# Altium PCB MAIN.PcbDoc
Units mm, origin at the board's own origin, x right, y up, seen from the top; angles counter-clockwise.
Board outline 75 x 50 mm, 2 copper layers (Top Layer, Bottom Layer), stack 1.571 mm thick; 33 components, 35 nets, 141 pads, 6 vias.
Unrouted connection lines stored in the file: 1.
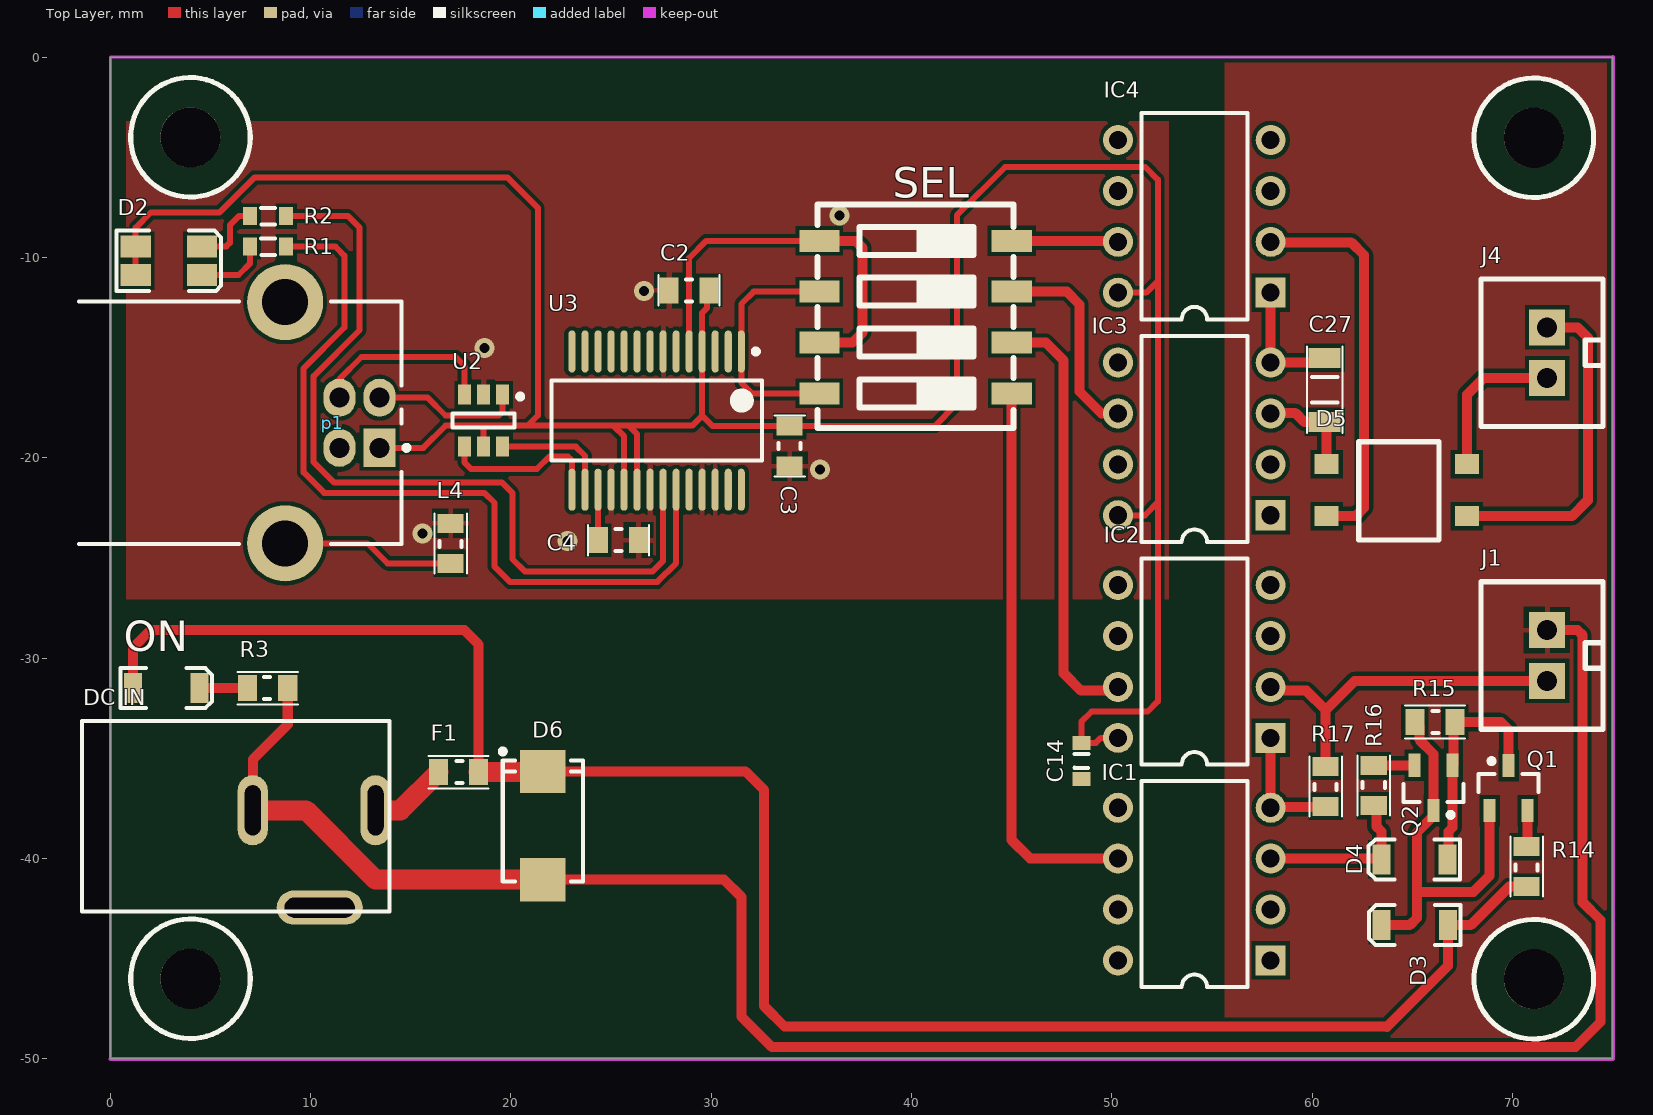
[diagram p0: Top Layer view]
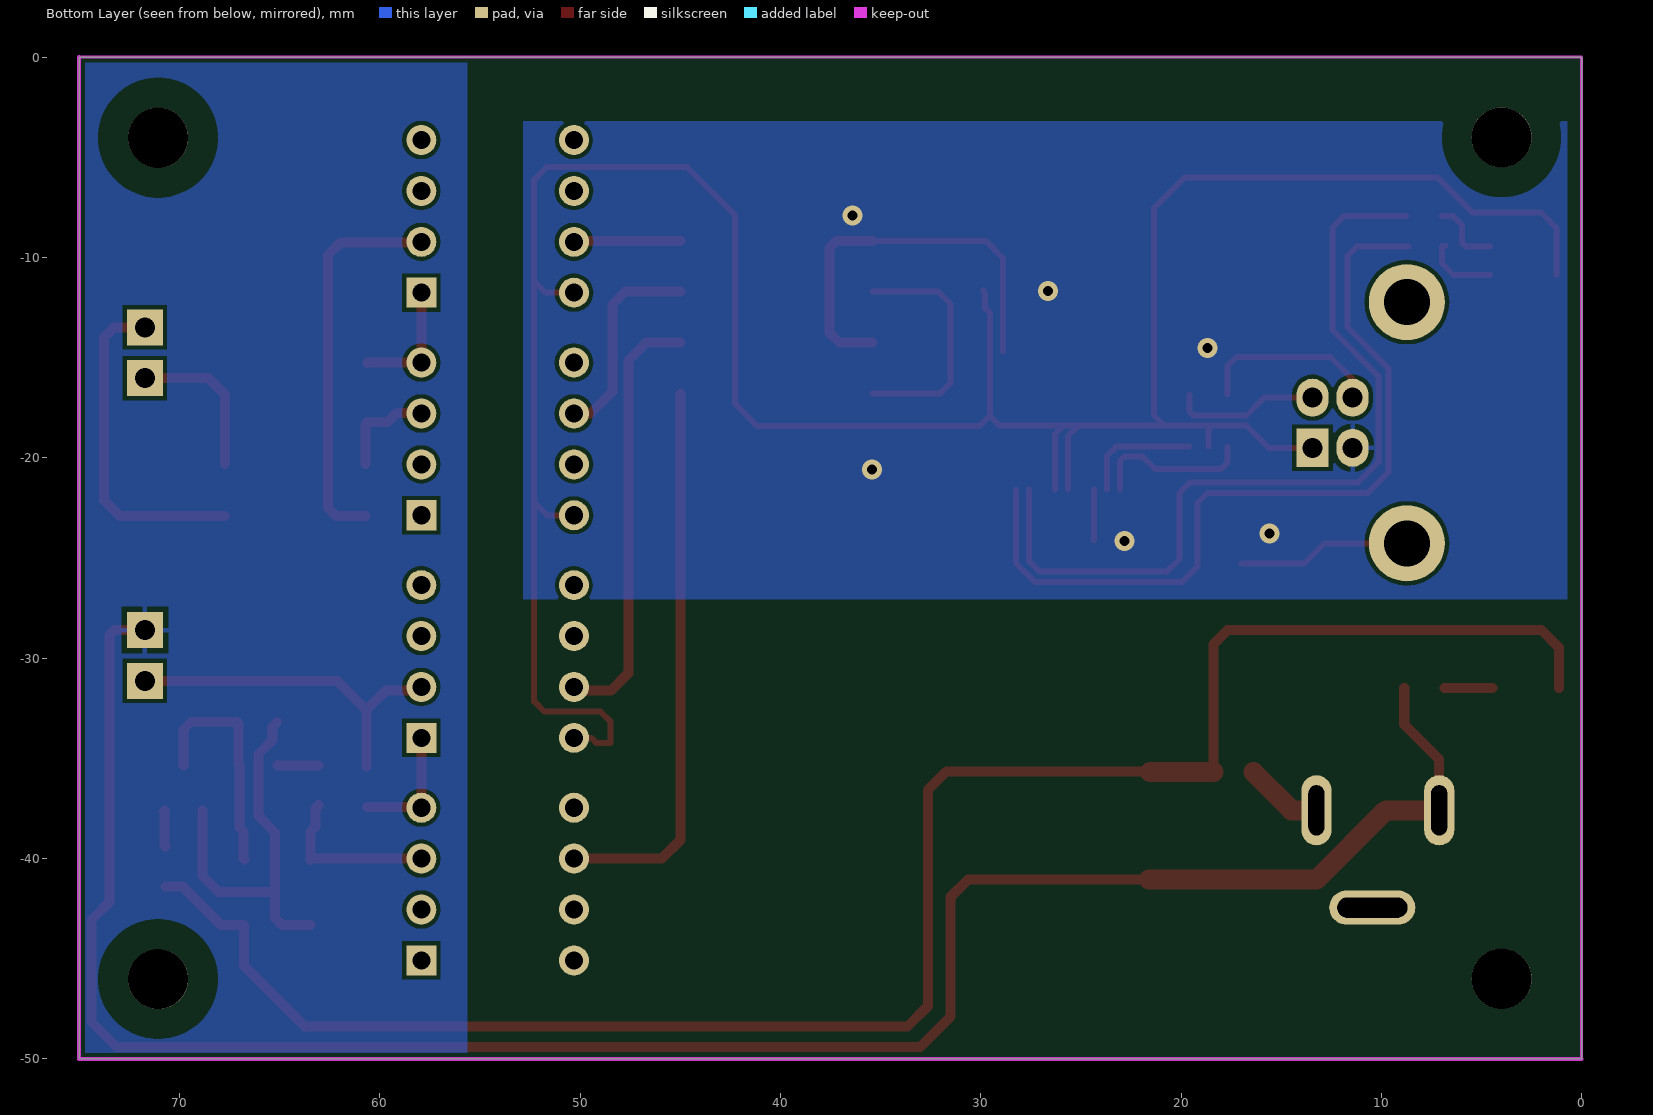
[diagram p1: Bottom Layer view, seen from below]
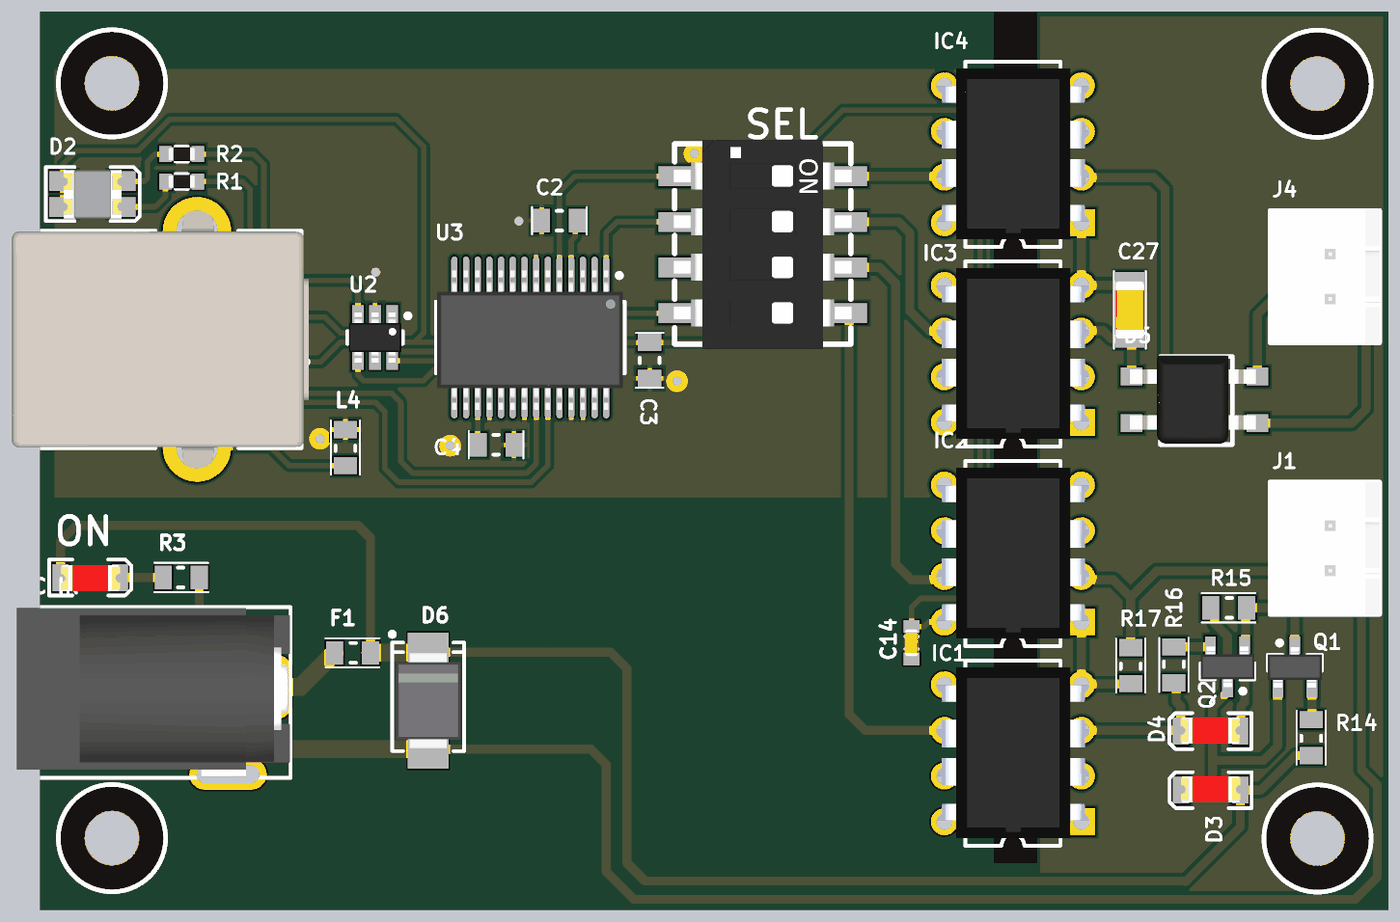
[diagram p2: 3D render of the assembled board from above, using the file's embedded part models]

## Layer stack, top to bottom
Top Solder: solder mask 0.0102, Solder Resist, Dk 3.5
Top Layer: signal copper 0.0356
Dielectric 1: dielectric 1.5, FR-4, Dk 4.8
Bottom Layer: signal copper 0.0356
Bottom Solder: solder mask 0.0102, Solder Resist, Dk 3.5

## Board outline
0,-50 75,-50 75,0 0,0

## Design rules (kind name [scope] priority, off if disabled: settings)
Clearance [All] p1: gap=0.2 ignorepadtopadclearanceinfootprint=FALSE
PolygonConnect PolygonConnect_1 [(InNet('GND') OR InNet('GND1') OR InNet('GND2') OR InNet('GND3')) vs IsVia] p1: connectstyle=Direct reliefconductorwidth=0.254 reliefentries=4 polygonreliefangle="90 Angle" airgapwidth=0.254
PolygonConnect [All] p2: connectstyle=Relief reliefconductorwidth=0.254 reliefentries=4 polygonreliefangle="90 Angle" airgapwidth=0.254
RoomDefinition MASTER [InComponentClass('MASTER')] p1: confinementstyle=ConfineIn formatcopy=TRUE lockcomponents=FALSE outline -4.318,-50.038 75.057,-50.038 75.057,-24.765 -4.318,-24.765
RoomDefinition SLAVE [InComponentClass('SLAVE')] p2: confinementstyle=ConfineIn formatcopy=TRUE lockcomponents=FALSE outline 47.194,-24.405 75.057,-24.405 75.057,-0.254 47.194,-0.254
RoomDefinition USB [InComponentClass('USB')] p3: confinementstyle=ConfineIn formatcopy=TRUE lockcomponents=FALSE outline -1.901,-27.178 36.576,-27.178 36.576,-2.697 -1.901,-2.697
RoutingVias [All] p1: holewidth=0.5 width=1 viastyle="Through Hole" minholewidth=0.5 minwidth=1 maxholewidth=5 maxwidth=1
SolderMaskExpansion [All] p1: expansion=0.102
Width [All] p1: maxlimit=1 minlimit=0.2 preferedwidth=0.3
30 further rules are at their usual default settings.

## Classes and differential pairs
component class USB: C2 C3 C4 D2 L4 p1 R1 R2 U2 U3
component class SLAVE: C27 D5 IC3 IC4 J4
component class MASTER: C14 D3 D4 D6 "DC IN" F1 IC1 IC2 J1 ON Q1 Q2 R3 R14 R15 R16 R17
component class Main: SEL

## Components (designator, comment, footprint, x,y, rotation, side; value= is the part's Value field where it differs from the comment)
C2 "100nF" C805 28.888,-11.642 r0 top
C3 "100nF" C805 33.909,-19.415 r90 top
C4 "100nF" C805 25.366,-24.109 r180 top
C14 "100nF" C603 48.474,-35.128 r90 top
C27 "1nF" C1206 60.618,-16.607 r90 top
D2 "LED-RG" LED-1210 2.921,-10.16 r0 top
D3 "LED" LED-1206 65.114,-43.328 r180 top
D4 "LED" LED-1206 65.098,-40.043 r180 top
D5 "HD08" MINIDIP 64.098,-21.611 r0 top
D6 "SMBJ12A" DO-214AA 21.59,-38.354 r0 top
"DC IN" "JACK" jack-dc 7.471,-41.112 r90 top
F1 "Fuse 1" PTC-0805 17.391,-35.678 r180 top
IC1 "HCPL-4100" DIP-8 54.316,-41.732 r90 top
IC2 "HCPL-4200" DIP-8 54.316,-30.622 r90 top
IC3 "HCPL-4100" DIP-8 54.316,-19.513 r90 top
IC4 "HCPL-4200" DIP-8 54.316,-8.403 r90 top
J1 "CONN-2" XH-2 71.718,-31.136 r90 top
J4 "CONN-2" XH-2 71.718,-16.023 r90 top
L4 "1K" r805 16.986,-24.267 r90 top
ON "LED" LED-1206 2.794,-31.496 r0 top
p1 "USB Connector" USB2-B-R -1.573,-18.247 r180 top
Q1 "BC856ALT1" SOT-23 69.797,-36.487 r90 top
Q2 "BC846ALT1" SOT-23 66.053,-36.469 r270 top
R1 "330" R0603 7.878,-9.458 r180 top
R2 "330" R0603 7.878,-7.934 r180 top
R3 "220" R805 7.858,-31.496 r0 top
R14 "100" R805 70.702,-40.407 r90 top
R15 "330K" R805 66.114,-33.185 r180 top
R16 "100" R805 63.066,-36.36 r270 top
R17 "470" R805 60.666,-36.398 r90 top
SEL "SW-DIP4" DIPSW-4-SMD 40.196,-12.975 r270 top
U2 "USBLC6-2" SOT-23-6 18.635,-18.14 r270 top
U3 "FT232RL" SSOP-28N 27.271,-18.14 r270 top

## Footprints (in the part's own frame and the unit in brackets; to place one, negate y for a bottom-side part, rotate by r counter-clockwise, add the part's x,y. Pads: shape width x height; smd on the part's side, far side on the other; paste and mask are expansions set on the pad)
C603 [mm]
  rect 0.7x0.9 smd: 1(-0.9,0) 2(0.9,0)
  silkscreen extent -0.35,-0.34 0.35,0.34, body extent -0.76,-0.38 0.76,0.38, height 0.6
C805 [mm]
  rect 0.95x1.3 smd: 1(-1,0) 2(1,0)
  silkscreen extent -1.52,-0.76 1.52,0.76, body extent -1,-0.62 1,0.63, height 0.78
C1206 [mm]
  rect 1x1.6 smd: 1(1.6,0) 2(-1.6,0)
  silkscreen extent -2.16,-0.89 2.16,0.89, body extent -1.6,-0.8 1.6,0.8, height 1
DIP-8 [mm]
  rect 1.5x1.5 hole 0.9: 1(-3.353,-3.607)
  round 1.5 hole 0.9: 2(-0.813,-3.607) 3(1.727,-3.607) 4(4.267,-3.607) 5(4.267,4.013) 6(1.727,4.013) 7(-0.813,4.013) 8(-3.353,4.013)
  silkscreen extent -4.69,-2.45 5.61,2.85, body extent -4.27,-4.09 5.23,4.44, height 3.59
DIPSW-4-SMD [mm]
  rect 1.1x2 smd: 1(-3.81,-4.8) 2(-1.27,-4.8) 3(1.27,-4.8) 4(3.81,-4.8) 5(3.81,4.8) 6(1.27,4.8) 7(-1.27,4.8) 8(-3.81,4.8)
  silkscreen extent -5.61,-4.9 5.53,4.9, body extent -5.82,-4.95 5.81,4.95, height 4.05
DO-214AA [mm]
  rect 2.26x2.16 smd: 1(0,-2.7) 2(0,2.7)
  silkscreen extent -2.12,-2.8 2,3.82, body extent -1.8,-2.7 1.8,2.7, height 2.3
jack-dc [mm]
  oval 1.7x4.3 hole 1 slot 3.5 at 90 deg: 1(-1.339,-2.982)
  oval 3.5x1.5 hole 0.8 slot 2.5 at 0 deg: 2(3.52,-5.77) 3(3.52,0.359)
  silkscreen extent -1.53,-6.47 7.96,8.89, body extent -1.48,-6.43 7.92,8.77, height 11
LED-1206 [mm]
  rect 0.9x1.5 smd: 1(-1.651,0) 2(1.651,0)
  silkscreen extent -2.29,-1 2.29,1, body extent -1.65,-0.76 1.65,0.69, height 1.36
LED-1210 [mm]
  rect 1.5x1.1 smd: 1(-1.651,0.713) 2(-1.651,-0.713) 3(1.651,-0.713) 4(1.651,0.713)
  silkscreen extent -2.6,-1.5 2.62,1.5, body extent -1.62,-1.36 1.62,1.34, height 1.1
MINIDIP [mm]
  rect 1.2x1 smd: 1(-3.381,1.3) 2(-3.381,-1.3) 3(3.619,-1.3) 4(3.619,1.3)
  silkscreen extent -1.78,-2.49 2.22,2.41, body extent -3.47,-2.44 3.53,2.46, height 2.65
PTC-0805 [mm]
  rect 0.95x1.3 smd: 1(1.008,0.009) 2(-0.992,0.009)
  silkscreen extent -1.49,-0.8 1.51,0.82, body extent -1.07,-0.67 1.07,0.67, height 0.66
R0603 [mm]
  rect 0.7x0.9 smd: 1(-0.9,0) 2(0.9,0)
  silkscreen extent -0.34,-0.42 0.34,0.42, body extent -0.76,-0.38 0.76,0.38, height 0.45
r805 [mm]
  rect 0.95x1.3 smd: 1(1,0) 2(-1,0)
  silkscreen extent -1.5,-0.81 1.5,0.81, body extent -1,-0.61 1,0.64, height 0.78
R805 [mm]
  rect 0.95x1.3 smd: 1(1,0) 2(-1,0)
  silkscreen extent -1.5,-0.81 1.5,0.81, body extent -1,-0.61 1,0.64, height 0.78
SOT-23 [mm]
  rect 1.15x0.6 smd: 1(-1.125,0.95) 2(-1.125,-0.95) 3(1.125,0)
  silkscreen extent -0.2,-1.5 1.47,1.5, body extent -1.13,-1.5 1.13,1.5, height 1.2
SOT-23-6 [mm]
  rect 1x0.65 smd: 1(-1.3,0.95) 2(-1.3,0) 3(-1.3,-0.95) 4(1.3,-0.95) 5(1.3,0) 6(1.3,0.95)
  silkscreen extent -1.32,-1.55 0.35,1.95, body extent -1.4,-1.45 1.4,1.45, height 1.45
SSOP-28N [mm]
  oval 2.1x0.35 smd: 1(-3.45,4.225) 2(-3.45,3.575) 3(-3.45,2.925) 4(-3.45,2.275) 5(-3.45,1.625) 6(-3.45,0.975) 7(-3.45,0.325) 8(-3.45,-0.325) 9(-3.45,-0.975) 10(-3.45,-1.625) 11(-3.45,-2.275) 12(-3.45,-2.925) 13(-3.45,-3.575) 14(-3.45,-4.225) 15(3.45,-4.225) 16(3.45,-3.575) 17(3.45,-2.925) 18(3.45,-2.275) 19(3.45,-1.625) 20(3.45,-0.975) 21(3.45,-0.325) 22(3.45,0.325) 23(3.45,0.975) 24(3.45,1.625) 25(3.45,2.275) 26(3.45,2.925) 27(3.45,3.575) 28(3.45,4.225)
  silkscreen extent -3.57,-5.25 2,5.25, body extent -3.73,-5.17 4.02,5.16, height 2.15
USB2-B-R [mm] "Connector; USB1.1, Type B, Thru-Hole; 4 Position; Right Angle"
  rect 1.6x1.9 hole 1: 1(-15.01,1.25)
  oval 1.6x1.9 hole 1: 2(-15.01,-1.25) 3(-13.01,-1.25) 4(-13.01,1.25)
  round 3.8 hole 2.3: 5(-10.3,6.02) 6(-10.3,-6.02)
  silkscreen extent -16.49,-6.05 -0.02,6.05, body extent -16.51,-7.45 -0.01,7.45, height 10.95
XH-2 [mm]
  rect 1.8x1.8 hole 1: 1(0,0) 2(2.54,0)
  silkscreen extent -2.41,-2.79 4.95,3.3, body extent -2.43,-2.8 4.97,3.3, height 7

## Part data
C2 C3 C4 C14 C27: library part Cap, "Capacitor", Designer="Parsa Malekpour"
D2: library part LED-RG-4
D6: library part SMBJxxA, "Surface Mount Transient Voltage Suppressors Diode"
"DC IN": library part JACK-DC
F1: "Fuse", LatestRevisionDate=17-Jul-2002, LatestRevisionNote="Re-released for DXP Platform.", PackageDescription="Thru-Hole; 2 Leads", PackageReference=PIN-W2/E2.8, Published=8-Jun-2000, Publisher="Altium Limited"
IC1 IC3: "<b>Isolation Amplifer</b><p> Source: http://www.avagotech.com/docs/AV02-0410EN", Package=None, Availability=Unavailable, MF="{'manufacturer': u'Broadcom Limited'}", MP=HCPL-4100, Price=None
IC2 IC4: "Optically Coupled 20 mA Current Loop Receiver", Package=None, Availability=Unavailable, MF="{'manufacturer': u'Broadcom Limited'}", MP=HCPL-4100, Price=None
L4: library part "Ferrite Bead", "FERRITE BEAD", Code_IEC=1005, Code_JEITA=0402, LatestRevisionDate=29-May-2009, LatestRevisionNote="IPC-7351 Footprint Added.", PackageDescription="Chip Inductor", Published=8-Jun-2000, Publisher="Altium Limited"
p1: library part USB2-B, "USB Connector-B Type", Adding Date=10/26/2010, Company="DASE Co", Designer="Eng. Saeid Jorablo"
Q1: "General Purpose Transistor PNP Silicon", ComponentLink1Description="Manufacturer Link", ComponentLink1URL=http://www.onsemi.com/site/products/landing?taxonomyID=194, ComponentLink2Description=Datasheet, ComponentLink2URL=http://www.onsemi.com/pub/Collateral/BC856ALT1-D.PDF, DatasheetVersion=1997, LatestRevisionDate=17-Jul-2002, LatestRevisionNote="Re-released for DXP Platform.", PackageDescription="SOT-23; 3 Leads; Body 3.0 x 2.6 mm, inc. leads (LxW max)", PackageReference=318-08, PackageVersion=1997, Published=29-Sep-2000, Publisher="Altium Limited"
Q2: "General Purpose Transistor NPN Silicon", ComponentLink1Description="Manufacturer Link", ComponentLink1URL=http://www.onsemi.com/site/products/landing?taxonomyID=194, ComponentLink2Description=Datasheet, ComponentLink2URL=http://www.onsemi.com/pub/Collateral/BC846ALT1-D.PDF, DatasheetVersion=1997, LatestRevisionDate=17-Jul-2002, LatestRevisionNote="Re-released for DXP Platform.", PackageDescription="SOT-23; 3 Leads; Body 3.0 x 2.6 mm, inc. leads (LxW max)", PackageReference=318-08, PackageVersion=1997, Published=29-Sep-2000, Publisher="Altium Limited"
R1 R2 R3 R14 R15 R16 R17: library part Resistor, "Resistor", Designer="Parsa Malekpour"
SEL: "DIP Switch", LatestRevisionDate=17-Jul-2002, LatestRevisionNote="Re-released for DXP Platform.", PackageReference=DIP-8, Published=24-Mar-1999, Publisher="Altium Limited"
U2: "Very low capacitance ESD protection"

## Free pads (board coordinates)
  round 3 hole 3 mask+1.5: 2(4,-4) 2(4,-46) 2(71.057,-46.021) 2(71.057,-4.021)

## Via types
v1: diameter 1, hole 0.5, Top Layer to Bottom Layer, 4 vias
v2: diameter 1, hole 0.5, Top Layer to Bottom Layer, tented both sides, 2 vias

## Nets (pads, with @x,y where several pads share a name; then routed paths per layer and width w, separated by ;. In a path a pad name is that pad's centre, name@x,y a point inside that pad or via, vN(x,y) a via of type N, cw(c..) or ccw(c..) an arc to the next point about the centre after c; other vN are vias at no path point)
+24V: D3.1 D6.2 F1.2 ON.1 R14.2 | length 94.3
  Top Layer w0.5: ON.1 1.143,-29.464 2.011,-28.596 17.674,-28.596 18.383,-29.305 F1.2 ; D6.2@21.557,-35.687 D6.2 31.717,-35.654 32.639,-36.576 32.639,-47.371 33.655,-48.387 63.738,-48.387 ; 63.717,-48.408 63.738,-48.387 ; R14.2 69.829,-41.407 67.908,-43.328 D3.1 66.765,-45.36 63.738,-48.387
  Top Layer w1: F1.2 D6.2@21.557,-35.687
GND: C14.1 IC1.5 IC2.5 IC2.6 IC3.5 IC4.5 IC4.6
GND2: C2.1 C3.1 C4.1 L4.1 p1.4 U2.2 U3.7 U3.18 U3.21 U3.25 U3.26
  other v1: 22.813,-24.16 15.574,-23.779 35.433,-20.574 36.402,-7.904
  other v2: 18.673,-14.508 26.636,-11.663
GND3: "DC IN.3" D6.1 J1.2 R3.1 | length 104.6
  Top Layer w0.5: 7.112,-37.592 7.112,-35.052 8.858,-33.306 R3.1 ; D6.1 30.64,-41.054 31.496,-41.91 31.496,-47.879 33.02,-49.403 73.136,-49.403 74.385,-48.154 74.385,-43.074 73.496,-42.185 73.496,-28.85 73.242,-28.596 J1.2
  Top Layer w1: 7.112,-37.592 9.779,-37.592 13.241,-41.054 D6.1
NetC4_2: C4.2 U3.17 | length 2.5
  Top Layer w0.3: U3.17 24.346,-24.089 C4.2
NetC27_1: C27.1 IC3.4 IC4.1 | length 5.8
  Top Layer w0.5: IC3.4 IC4.1 ; IC3.4@58.332,-15.21 58.356,-15.234 60.595,-15.234 C27.1@60.618,-15.257
NetC27_2: C27.2 D5.1 IC3.3 | length 4.6
  Top Layer w0.5: IC3.3@58.332,-17.75 59.145,-17.75 59.602,-18.207 C27.2 60.717,-18.306 D5.1
NetD2_3: D2.3 R1.2 | length 3.6
  Top Layer w0.3: D2.3 6.399,-10.873 6.978,-10.294 R1.2 ; R1.2@6.802,-9.409 R1.2@6.851,-9.458
NetD2_4: D2.4 R2.2 | length 3.6
  Top Layer w0.3: D2.4 5.793,-9.447 5.969,-9.271 5.969,-8.382 6.417,-7.934 R2.2
NetD3_2: D3.2 Q1.1 Q2.3 R15.1 | length 19.6
  Top Layer w0.5: D3.2 64.86,-43.328 65.225,-42.963 65.225,-41.677 ; R15.1 65.339,-33.41 65.339,-34.069 66.053,-34.783 Q2.3 66.053,-37.869 65.225,-38.697 65.225,-41.677 ; Q1.1 68.847,-40.865 68.035,-41.677 65.225,-41.677
NetD4_1: D4.1 Q1.3 Q2.1 R15.2 | length 11.6
  Top Layer w0.5: D4.1 66.803,-39.989 66.803,-38.646 67.003,-38.446 Q2.1 67.053,-35.294 67.053,-33.246 R15.2 69.416,-33.185 69.797,-33.566 Q1.3
NetD4_2: D4.2 IC1.3 R16.1 | length 8.3
  Top Layer w0.5: IC1.3 D4.2@63.298,-40.005 ; R16.1@63.044,-37.338 R16.1 63.193,-37.487 63.193,-38.392 63.447,-38.646 D4.2 D4.2@63.473,-40.068
NetD5_2: D5.2 IC4.2 | length 19.2
  Top Layer w0.5: IC4.2@58.332,-9.241 61.939,-9.241 62.574,-9.876 62.574,-22.5 62.163,-22.911 D5.2
NetD5_3: D5.3 J4.2 | length 16.7
  Top Layer w0.5: D5.3 72.958,-22.911 73.75,-22.119 73.75,-13.991 73.242,-13.483 J4.2
NetD5_4: D5.4 J4.1 | length 7.8
  Top Layer w0.5: D5.4 67.717,-16.849 68.543,-16.023 J4.1
"NetDC IN_2": "DC IN.2" F1.1 | length 3.9
  Top Layer w1: 13.241,-37.592 14.478,-37.592 F1.1
NetIC1_4: IC1.4 IC2.1 R17.2 | length 6
  Top Layer w0.5: IC1.4 IC2.1@57.923,-34.163 ; IC1.4@57.956,-37.431 R17.2@60.633,-37.431
NetIC1_6: IC1.6 SEL.5 | length 28
  Top Layer w0.5: SEL.5 44.996,-39.085 45.916,-40.005 IC1.6
NetIC2_2: IC2.2 J1.1 R17.1 | length 17.6
  Top Layer w0.5: IC2.2@57.923,-31.623 59.701,-31.623 60.666,-32.588 ; R17.1 60.666,-32.588 ; J1.1 62.118,-31.136 60.666,-32.588
NetIC2_7: IC2.7 SEL.6 | length 21.7
  Top Layer w0.5: SEL.6 46.699,-14.245 47.588,-15.134 47.588,-30.755 48.456,-31.623 IC2.7@50.303,-31.623
NetIC3_6: IC3.6 SEL.7 | length 10.4
  Top Layer w0.5: SEL.7 47.75,-11.705 48.385,-12.34 48.385,-16.693 49.478,-17.785 IC3.6
NetIC4_7: IC4.7 SEL.8 | length 5.3
  Top Layer w0.5: SEL.8 50.252,-9.165 IC4.7
NetL4_2: L4.2 p1.5 p1.6 | length 8
  Top Layer w0.3: p1.5@9.359,-24.267 12.837,-24.267 13.837,-25.267 L4.2
NetON_2: ON.2 R3.2 | length 2.4
  Top Layer w0.5: ON.2 R3.2
Netp1_2: p1.2 U2.1 | length 6.8
  Top Layer w0.3: p1.2@14.069,-16.997 15.841,-16.997 16.73,-17.886 19.397,-17.886 19.585,-17.698 U2.1
Netp1_3: p1.3 U2.3 | length 9.2
  Top Layer w0.3: p1.3 11.437,-16.067 12.539,-14.965 17.238,-14.965 17.364,-15.091 17.685,-15.412 U2.3
NetQ1_2: Q1.2 R14.1 | length 1.8
  Top Layer w0.5: R14.1 70.747,-39.362 Q1.2 Q1.2@70.756,-37.621
NetQ2_2: Q2.2 R16.2 | length 2
  Top Layer w0.5: R16.2 63.074,-35.352 65.095,-35.352 Q2.2
NetR1_1: R1.1 U3.23 | length 41.7
  Top Layer w0.3: R1.1@8.651,-9.458 R1.1 11.24,-9.458 11.688,-9.906 11.688,-13.492 9.652,-15.528 9.652,-20.727 10.672,-21.747 18.673,-21.747 19.181,-22.255 19.181,-25.43 19.943,-26.192 27.309,-26.192 28.246,-25.255 U3.23
NetR2_1: R2.1 U3.22 | length 42
  Top Layer w0.3: R2.1 11.875,-7.934 12.45,-8.509 12.45,-13.619 10.152,-15.917 10.152,-20.211 11.18,-21.239 19.562,-21.239 20.07,-21.747 20.07,-25.049 20.705,-25.684 27.055,-25.684 27.596,-25.143 U3.22
NetSEL_1: SEL.1 SEL.3 U3.5 | length 20.4
  Top Layer w0.3: U3.5 28.896,-10.026 29.757,-9.165 SEL.1
  Top Layer w0.5: SEL.3 37.047,-14.245 37.555,-13.737 37.555,-9.525 37.195,-9.165 SEL.1
NetSEL_2: SEL.2 SEL.4 U3.1 | length 12.2
  Top Layer w0.3: SEL.4 32.025,-16.785 31.496,-16.256 U3.1 31.496,-12.319 32.11,-11.705 SEL.2
NetU2_4: U2.4 U3.15 | length 8.1
  Top Layer w0.3: U2.4 17.685,-20.238 18,-20.553 21.302,-20.553 21.915,-19.94 22.848,-19.94 22.952,-20.044 23.046,-20.138 U3.15
NetU2_6: U2.6 U3.16 | length 6
  Top Layer w0.3: U2.6 23.237,-19.44 23.696,-19.899 U3.16
VUSB: C2.2 C3.2 C14.2 D2.1 D2.2 IC1.8 IC2.8 IC3.8 IC4.8 p1.1 U2.5 U3.4 U3.19 U3.20 | length 137.5
  Top Layer w0.3: D2.2 D2.1 1.27,-8.509 2.032,-7.747 5.461,-7.747 7.209,-5.999 19.816,-5.999 21.34,-7.523 21.34,-17.886 20.832,-18.394 ; p1.1@14.069,-19.497 15.627,-19.497 16.73,-18.394 18.459,-18.394 ; U2.5 18.635,-18.57 18.459,-18.394 ; U3.19 25.646,-18.928 25.112,-18.394 ; U3.20 26.296,-18.816 25.874,-18.394 ; C2.2 29.777,-11.753 29.777,-12.531 29.546,-12.762 U3.4 29.546,-17.897 ; IC2.8 49.448,-33.975 49.195,-34.228 C14.2 48.474,-33.171 48.985,-32.66 51.779,-32.66 52.287,-32.152 52.287,-22.225 ; IC3.8 51.647,-22.865 52.287,-22.225 ; IC4.8 51.707,-11.756 52.287,-11.176 ; 18.459,-18.394 20.832,-18.394 ; 20.832,-18.394 25.112,-18.394 ; 25.112,-18.394 25.874,-18.394 ; 25.874,-18.394 29.049,-18.394 29.546,-17.897 ; 29.546,-17.897 30.064,-18.415 C3.2 41.148,-18.415 42.254,-17.309 42.254,-7.895 44.667,-5.482 51.652,-5.482 52.287,-6.117 52.287,-11.176 ; 52.287,-22.225 52.287,-11.176
pads on no net: "DC IN.1" IC1.1 IC1.2 IC1.7 IC2.3 IC2.4 IC3.1 IC3.2 IC3.7 IC4.3 IC4.4 U3.2 U3.3 U3.6 U3.8 U3.9 U3.10 U3.11 U3.12 U3.13 U3.14 U3.24 U3.27 U3.28

## Polygon pours and split planes (outlines as drawn)
GND3 on Top Layer "GND3_L01_P030" (solid, pour order 30): 75,0 55.626,0 55.626,-50 75,-50
GND2 on Top Layer "GND2_L01_P017" (solid, pour order 17): 52.832,-3.205 0.792,-3.205 0.792,-27.051 52.832,-27.051
GND3 on Bottom Layer "GND3_L02_P032" (solid, pour order 32): 75,0 55.626,0 55.626,-50 75,-50
GND2 on Bottom Layer "GND2_L02_P021" (solid, pour order 21): 52.832,-3.205 0.715,-3.205 0.715,-27.051 52.832,-27.051

## Keep-outs
Keep-Out Layer:
  the board outline again, w0.2

## Other copper
Multi-Layer:
  pour cut-out: 4,-6.984 cw(c4,-4) 1.016,-4 cw(c4,-4) 4,-1.016 cw(c4,-4) 6.984,-4 cw(c4,-4)
  pour cut-out: 4,-48.984 cw(c4,-46) 1.016,-46 cw(c4,-46) 4,-43.016 cw(c4,-46) 6.984,-46 cw(c4,-46)
  pour cut-out: 71.057,-49.005 cw(c71.057,-46.021) 68.073,-46.021 cw(c71.057,-46.021) 71.057,-43.036 cw(c71.057,-46.021) 74.041,-46.021 cw(c71.057,-46.021)
  pour cut-out: 71.057,-7.005 cw(c71.057,-4.021) 68.073,-4.021 cw(c71.057,-4.021) 71.057,-1.036 cw(c71.057,-4.021) 74.041,-4.021 cw(c71.057,-4.021)

## Silkscreen, mask and mechanical layers (free items; w line width, h text height)
Top Overlay:
  circle w0.254: c4,-4 r2.984
  circle w0.254: c4,-46 r2.984
  circle w0.254: c71.057,-46.021 r2.984
  circle w0.254: c71.057,-4.021 r2.984
Top Solder:
  rectangle: 53.049,-47.392 55.462,-0.021

## Text inside footprints (layer, text, board x,y; h text height)
p1: Mechanical 1 "PCB Edge" at -1.248,-12.595 h0.25 r270